# Altium PCB PCB.PcbDoc
Units mm, origin at the board's own origin, x right, y up, seen from the top; angles counter-clockwise.
Board outline 160.02 x 130.81 mm, 2 copper layers (Top Layer, Bottom Layer); 43 components, 24 nets, 102 pads, 2 vias.
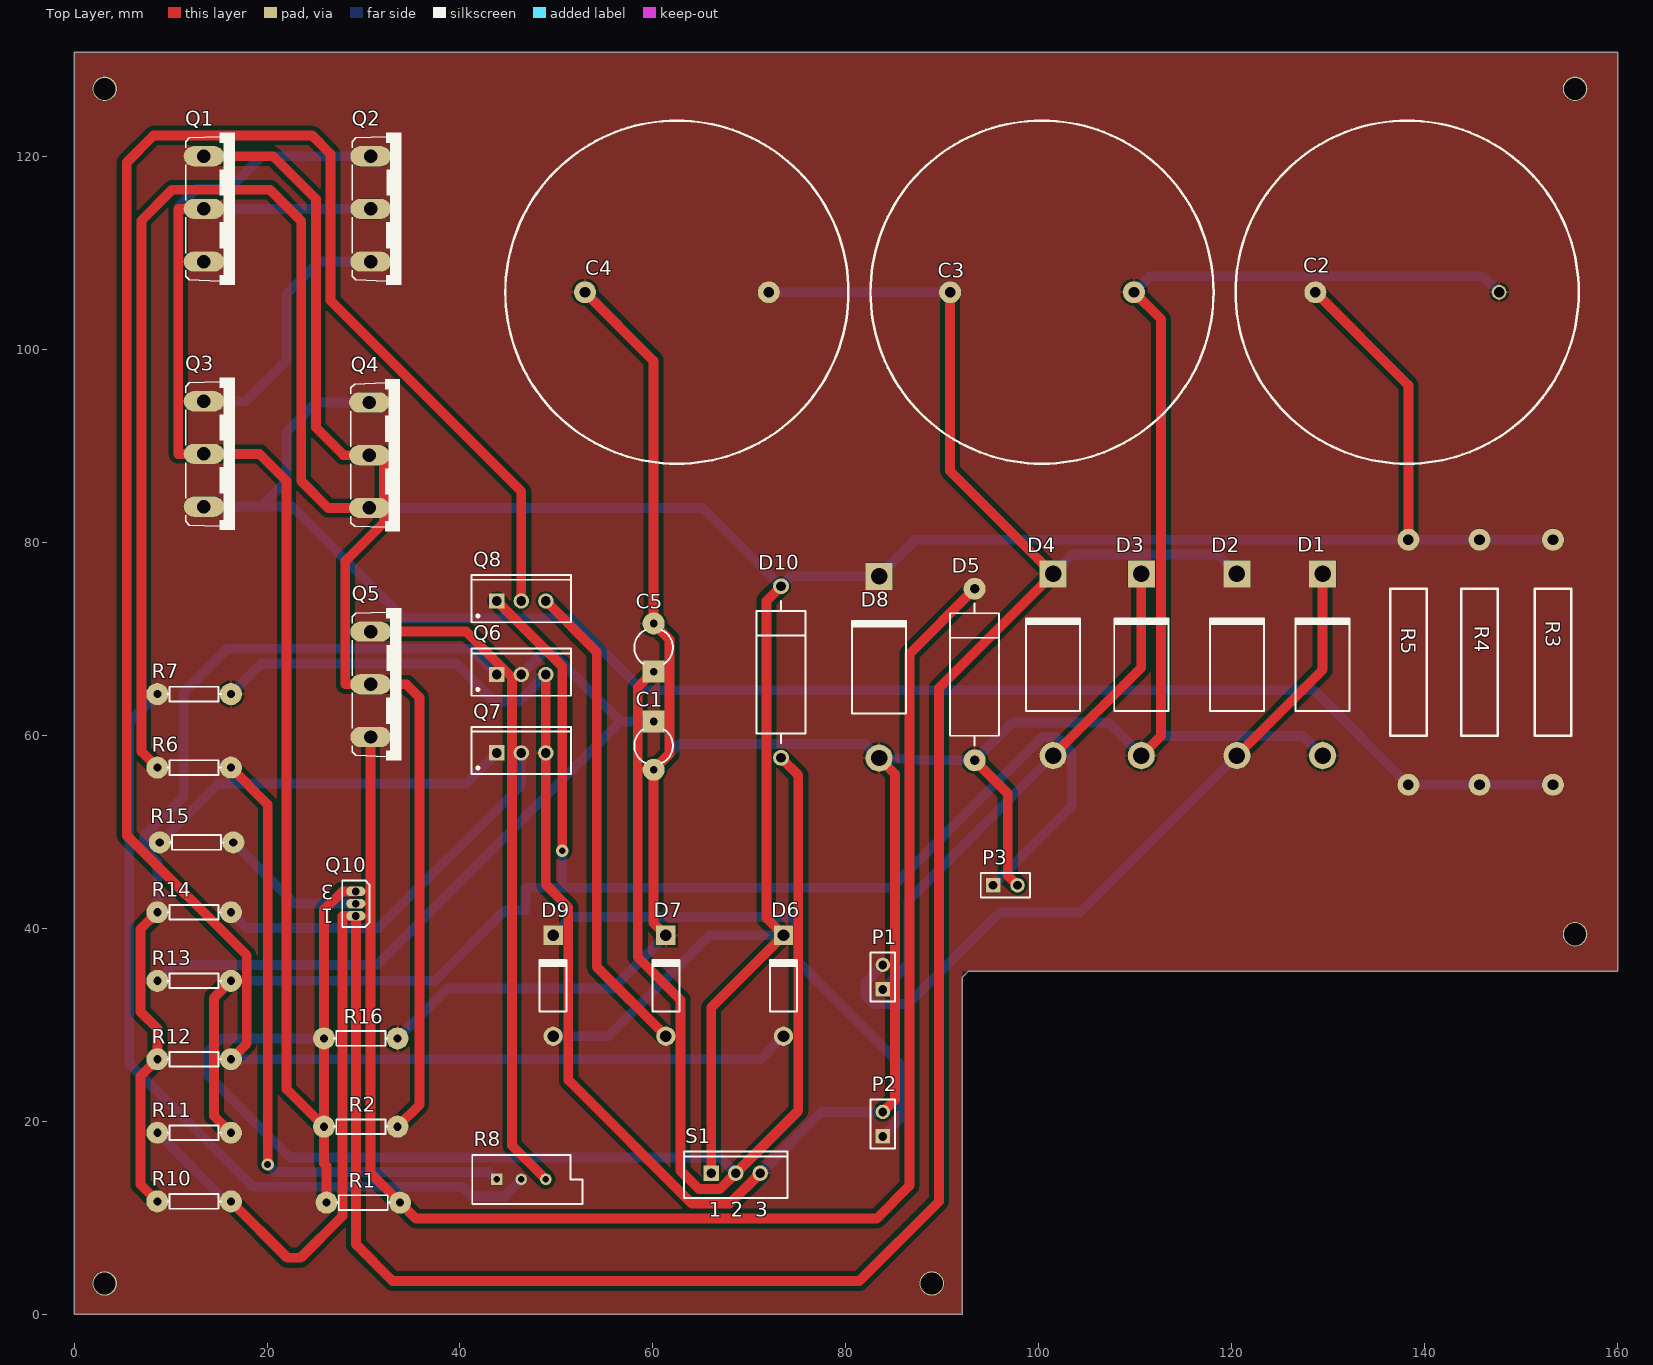
[diagram p0: Top Layer view]
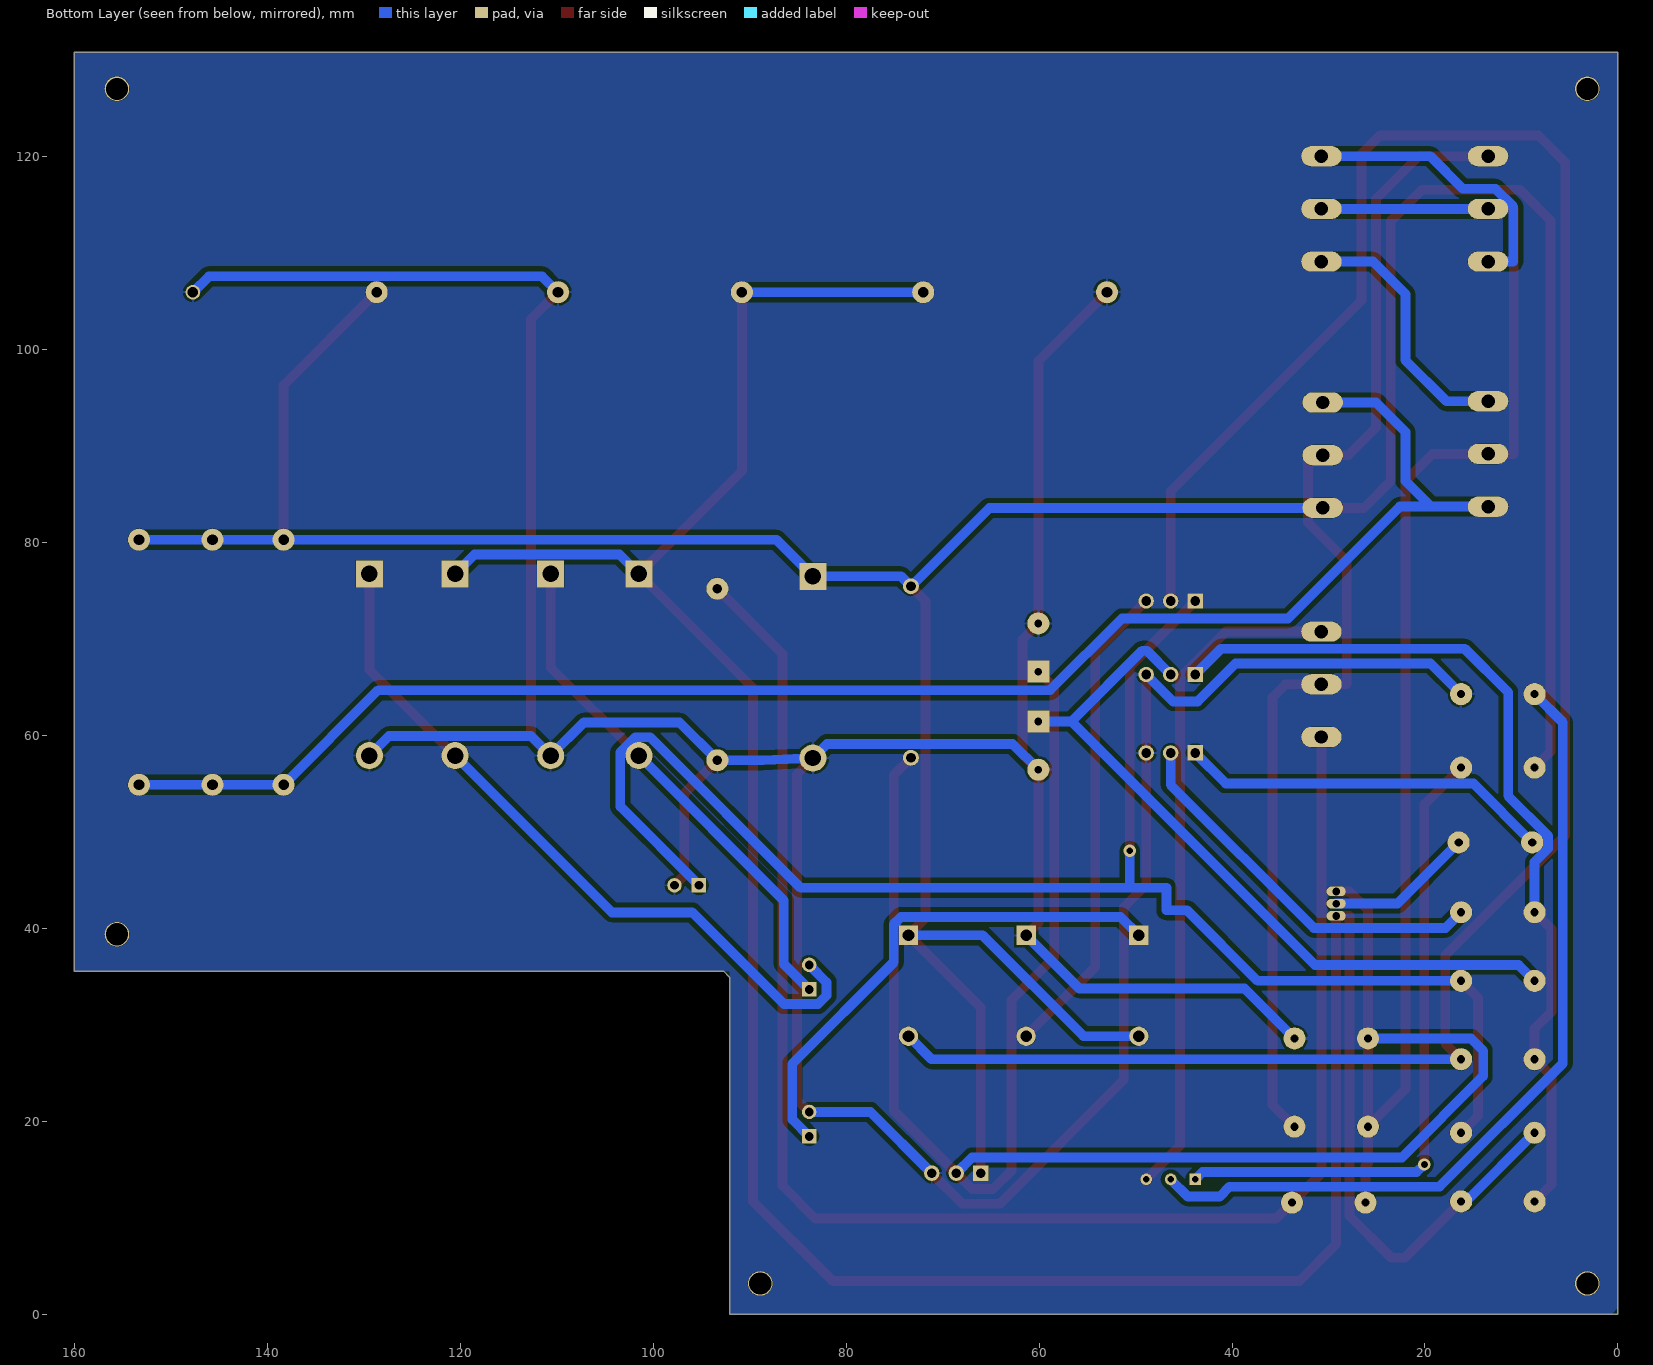
[diagram p1: Bottom Layer view, seen from below]

## Layer stack, top to bottom
Top Solder: solder mask 0.0102, Solder Resist, Dk 3.5
Top Layer: signal copper 0.0356
Dielectric 1: dielectric 0.32, FR-4, Dk 4.8
Bottom Layer: signal copper 0.0356
Bottom Solder: solder mask 0.0102, Solder Resist, Dk 3.5

## Board outline
0,0 92.075,0 92.075,34.925 92.71,35.56 160.02,35.56 160.02,130.81 0,130.81

## Design rules (kind name [scope] priority, off if disabled: settings)
Clearance [All] p1: gap=0 ignorepadtopadclearanceinfootprint=FALSE except(0.5: Arc-Arc Arc-Track Arc-Fill Arc-Poly Arc-Region Track-Track Track-Fill Track-Poly Track-Region)
PolygonConnect [All] p1: connectstyle=Relief reliefconductorwidth=0.254 reliefentries=4 polygonreliefangle="90 Angle" airgapwidth=0.254
RoutingVias [All] p1: holewidth=0.711 width=1.27 viastyle="Through Hole" minholewidth=0.711 minwidth=1.27 maxholewidth=0.711 maxwidth=1.27
SolderMaskExpansion [All] p1: expansion=0.102
Width [All] p1: maxlimit=1.397 minlimit=1.003 preferedwidth=1.016
30 further rules are at their usual default settings.

## Components (designator, comment, footprint, x,y, rotation, side; value= is the part's Value field where it differs from the comment)
C1 "Cap2" CAPR5-4X5 60.071,58.928 r270 top value=0.1uF
C2 "10mF" PCBComponent_1#1 128.651,105.918 r0 top
C3 "10mF" PCBComponent_1#2 90.805,105.918 r0 top
C4 "10mF" PCBComponent_1#2 72.009,105.918 r180 top
C5 "Cap2" CAPR5-4X5 60.071,69.088 r90 top value=0.047uF
D1 "Diode 1N5408" DO-201AD 129.413,67.31 r90 top
D2 "Diode 1N5408" DO-201AD 120.523,67.31 r90 top
D3 "Diode 1N5408" DO-201AD 110.617,67.31 r90 top
D4 "Diode 1N5408" DO-201AD 101.473,67.31 r90 top
D5 "6.2V" DIODE-0.7#1 93.345,66.294 r90 top
D6 "Diode 11DQ03" DO-204AL 73.533,34.036 r90 top
D7 "Diode 11DQ03" DO-204AL 61.341,34.036 r90 top
D8 "Diode 1N5408" DO-201AD 83.439,67.056 r90 top
D9 "Diode 11DQ03" DO-204AL 49.657,34.036 r90 top
D10 "10V" DIODE-0.7#2 73.279,66.548 r90 top
P1 "Header 2" HDR1X2 83.82,33.655 r90 top
P2 "Header 2" HDR1X2 83.82,18.415 r90 top
P3 "Header 2" HDR1X2 95.25,44.45 r0 top
Q1 "TIP3055" TOP3AV 16.637,114.554 r270 top
Q2 "TIP3055" TOP3AV 33.909,114.554 r270 top
Q3 "TIP3055" TOP3AV 16.637,89.154 r270 top
Q4 "TIP3055" TOP3AV 33.782,89.027 r270 top
Q5 "TIP3055" TOP3AV 33.909,65.278 r270 top
Q6 "NPN" TO-262-AA 46.355,66.294 r0 top
Q7 "NPN" TO-262-AA 46.355,58.166 r0 top
Q8 "NPN" TO-262-AA 46.355,73.914 r0 top
Q10 "PNP1" E3 29.21,42.545 r180 top
R1 "Res1" AXIAL-0.3 29.972,11.557 r180 top value=1K
R2 "Res1" AXIAL-0.3 29.718,19.431 r180 top value=1K
R3 "0.22" PCBComponent_1#3 153.289,54.864 r90 top
R4 "0.22" PCBComponent_1#3 145.669,54.864 r90 top
R5 "0.22" PCBComponent_1#3 138.303,54.864 r90 top
R6 "Res1" AXIAL-0.3 12.446,56.642 r180 top value=0.5K
R7 "Res1" AXIAL-0.3 12.446,64.262 r180 top value=2K
R8 "RPot" VR5 46.355,13.97 r0 top value=2K
R10 "Res1" AXIAL-0.3 12.446,11.684 r0 top value=4.7K
R11 "Res1" AXIAL-0.3 12.446,18.796 r180 top value=4.7K
R12 "Res1" AXIAL-0.3 12.446,26.416 r180 top value=22K
R13 "Res1" AXIAL-0.3 12.446,34.544 r180 top value=22K
R14 "Res1" AXIAL-0.3 12.446,41.656 r180 top value=100K
R15 "Res1" AXIAL-0.3 12.7,48.895 r0 top value=3.3K
R16 "Res1" AXIAL-0.3 29.718,28.575 r180 top value=1K
S1 "SCR" TO-220-AB 68.58,14.605 r0 top

## Footprints (in the part's own frame and the unit in brackets; to place one, negate y for a bottom-side part, rotate by r counter-clockwise, add the part's x,y. Pads: shape width x height; smd on the part's side, far side on the other; paste and mask are expansions set on the pad)
AXIAL-0.3 [mil] "Axial Device, Thru-Hole; 2 Leads; 0.3 in Pin Spacing"
  round 90 hole 33.46: 1(-150,0) 2(150,0)
  silkscreen extent -109,-30 109,30
CAPR5-4X5 [mil] "Capacitor; 2 Leads"
  rect 90x90 hole 31.5: 1(-98.43,0)
  round 90 hole 31.5: 2(98.43,0)
  silkscreen extent -66,-79 72,79
DIODE-0.7#1 [mil] "Diode, Thru-Hole; 2 Leads; 0.7 in Pin Spacing"
  round 90 hole 39.37: 1(-350,0) 2(350,0)
  silkscreen extent -290,-100 290,100
DIODE-0.7#2 [mil] "Diode, Thru-Hole; 2 Leads; 0.7 in Pin Spacing"
  round 64.96 hole 39.37: 1(-350,0) 2(350,0)
  silkscreen extent -290,-100 290,100
DO-201AD [mm] "Diode, Axial; Body 9.5 x 5.6 mm (LxDia. max), Lead Dia. 1.32 mm (max)"
  round 2.8 hole 1.7: 1(-9.42,0)
  rect 2.8x2.8 hole 1.7: 2(9.42,0)
  silkscreen extent -4.8,-2.8 4.9,2.8
DO-204AL [mm] "Diode, Axial; Body 5.2 x 2.7 mm (LxDia. max), Lead Dia. 0.86 mm (max)"
  round 2 hole 1.2: 1(-5.23,0)
  rect 2x2 hole 1.2: 2(5.23,0)
  silkscreen extent -2.65,-1.4 2.75,1.4
E3 [mm] "TO, Flat Index; 3 In-Line, Axial Leads; Body Dia. 4.6mm; Lead Dia. 0.5 mm (max)"
  oval 2x1 hole 0.8: 1(0,1.27) 2(0,0) 3(0,-1.27)
  silkscreen extent -1.41,-2.41 1.41,2.41
HDR1X2 [mm] "Connector; Header; 2 Position"
  rect 1.5x1.5 hole 0.9: 1(0,0)
  round 1.5 hole 0.9: 2(2.54,0)
  silkscreen extent -1.27,-1.27 3.81,1.27
PCBComponent_1#1 [mil]
  round 90 hole 43.31: 1(0,0)
  round 60 hole 43.31: 2(750,0)
  silkscreen extent -325,-700 1075,700
PCBComponent_1#2 [mil]
  round 90 hole 43.31: 1(0,0) 2(750,0)
  silkscreen extent -325,-700 1075,700
PCBComponent_1#3 [mil]
  round 90 hole 43.31: 1(0,0) 2(1000,0)
  silkscreen extent 200,-75 800,75
TO-220-AB [mm] "TO, Thru-Hole, Vertical, Heatsink Mounted; 3 In-Line Leads; Pitch 2.54 mm"
  rect 1.6x1.6 hole 1: 1(-2.54,0)
  round 1.6 hole 1: 2(0,0) 3(2.54,0)
  silkscreen extent -5.35,-2.55 5.35,2.25
TO-262-AA [mm] "TO, Thru-Hole, Vertical, Heatsink Mounted; 3 In-Line Leads; Pitch 2.54 mm"
  rect 1.6x1.6 hole 1: 1(-2.54,0)
  round 1.6 hole 1: 2(0,0) 3(2.54,0)
  silkscreen extent -5.15,-2.2 5.15,2.7, body extent -5.2,-2.25 5.2,2.75, height 19.7
TOP3AV [mil]
  oval 82.5x165 hole 55: B(-215,-125) C(0,-125) E(215,-125)
  silkscreen extent -310,-200 310,0
VR5 [mm] "Thru-Hole; 3 Leads"
  rect 1.2x1.2 hole 0.7: 1(-2.54,0)
  round 1.2 hole 0.7: 2(0,0) 3(2.54,0)
  silkscreen extent -5.08,-2.54 6.35,2.54

## Part data
C1 C5: "Capacitor", PackageDescription="Capacitor; 2 Leads", PackageReference=CAPR5-4X5, Published=23-Sep-2002, Publisher="Altium Limited"
C2 C3 C4: library part Component_1, "diameter 35mm"
D1 D2 D3 D4 D8: "3 Amp Medium Power Silicon Rectifier Diode", ComponentLink1Description="Manufacturer Link", ComponentLink1URL=http://www.irf.com/, DatasheetVersion=Aug-1984, LatestRevisionDate=17-Jul-2002, LatestRevisionNote="Re-released for DXP Platform.", PackageDescription="Diode, Axial; Body 9.5 x 5.3 mm (LxDia. max), Lead Dia. 1.32 mm (max)", PackageReference=DO-201AD, Published=8-Jun-2000, Publisher="Altium Limited"
D5 D10: library part "D Zener", "Zener Diode", LatestRevisionDate=17-Jul-2002, LatestRevisionNote="Re-released for DXP Platform.", PackageDescription="Diode, Thru-Hole; 2 Leads; 0.7 in Pin Spacing", PackageReference=DIODE-0.7, Published=8-Jun-2000, Publisher="Altium Limited"
D6 D7 D9: "Schottky Rectifier", Code_JEDEC=DO-204-AL, ComponentLink1Description="Manufacturer Link", ComponentLink1URL=http://www.irf.com/, ComponentLink2Description=Datasheet, ComponentLink2URL=http://www.irf.com/product-info/datasheets/data/11dq03.pdf, DatasheetVersion=Dec-1997, LatestRevisionDate=17-Jul-2002, LatestRevisionNote="Re-released for DXP Platform.", PackageDescription="Diode, Axial; Body 5.2 x 2.7 mm (LxDia. max), Lead Dia. 0.86 mm (max)", PackageReference=DO-204AL, Published=8-Jun-2000, Publisher="Altium Limited"
P1 P2 P3: "Header, 2-Pin", LatestRevisionDate=17-Jul-2002, LatestRevisionNote="Re-released for DXP Platform.", Publisher="Altium Limited"
Q1 Q2 Q3 Q4 Q5: "Tranzistor bipolar _BJT_ NPN 60V 15A 90W Gura de trecere TO-247-3", Package="TO-247-3 Bourns", Availability=Unavailable, MF="ON Semiconductor", MP=TIP3055, Price=None, SnapEDA_Link=https://www.snapeda.com/parts/TIP3055/ON%20Semiconductor/view-part/2756238/?ref=snap
Q6 Q7 Q8: "NPN Bipolar Transistor", Code_JEDEC=TO-226-AA, LatestRevisionDate=17-Jul-2002, LatestRevisionNote="Re-released for DXP Platform.", PackageDescription="TO, Flat Index; 3 In-Line, Axial Leads; Body Dia. 4.8mm; Leads 0.55 x 0.51 mm (max)", PackageReference=TO-226-AA, Published=8-Jun-2000, Publisher="Altium Limited"
Q10: "PNP Darlington Bipolar Transistor", ComponentLink1Description="Manufacturer Link", ComponentLink1URL=http://www.zetex.com/, DatasheetVersion=May-1994, LatestRevisionDate=17-Jul-2002, LatestRevisionNote="Re-released for DXP Platform.", PackageDescription="TO, Flat Index; 3 In-Line, Axial Leads; Body Dia. 4.6mm; Lead Dia. 0.5 mm (max)", PackageReference=E3, PackageVersion=1995/1996, Published=8-Jun-2000, Publisher="Altium Limited"
R1 R2 R6 R7 R10 R11 R12 R13 R14 R15 R16: "Resistor", LatestRevisionDate=17-Jul-2002, LatestRevisionNote="Re-released for DXP Platform.", PackageDescription="Axial Device, Thru-Hole; 2 Leads; 0.3 in Pin Spacing", PackageReference=AXIAL-0.3, Published=8-Jun-2000, Publisher="Altium Limited"
R3 R4 R5: library part Component_1, "25mm length"
R8: "Potentiometer", LatestRevisionDate=17-Jul-2002, LatestRevisionNote="Re-released for DXP Platform.", PackageDescription="Variable Resistor, Thru-Hole; 3 Leads", PackageReference=VR5, Published=8-Jun-2000, Publisher="Altium Limited", Set Position=0.5, Sim Note="Enter the Resistance value and the set point into parameter fields."
S1: "Silicon Controlled Rectifier", Code_JEDEC=TO-220-AB, LatestRevisionDate=17-Jul-2002, LatestRevisionNote="Re-released for DXP Platform.", PackageReference=TO-220-AB, Published=8-Jun-2000, Publisher="Altium Limited"

## Free pads (board coordinates)
  round 2.54 hole 2.286: 17(3.175,3.175) 17(3.175,127) 17(88.9,3.175) 17(155.575,39.37) 17(155.575,127)

## Via types
v1: diameter 1.27, hole 0.711, Top Layer to Bottom Layer, 2 vias

## Nets (pads, with @x,y where several pads share a name; then routed paths per layer and width w, separated by ;. In a path a pad name is that pad's centre, name@x,y a point inside that pad or via, vN(x,y) a via of type N, cw(c..) or ccw(c..) an arc to the next point about the centre after c; other vN are vias at no path point)
GND: C1.2 C2.2 C3.2 C4.2 C5.2 D1.1 D3.1 D5.1 D7.2 D8.1 P2.2 P3.2 Q6.3 Q7.3 R7.1 R16.1 S1.3 | length 443
  Top Layer w1.016: Q6.3 Q7.3 48.895,44.501 51.232,42.164 51.232,24.257 64.051,11.438 67.953,11.438 S1.3 ; C4.2 60.071,98.806 C5.2 61.722,69.937 61.722,58.079 C1.2 60.071,40.536 D7.2 ; D8.1 85.078,55.997 85.078,22.213 P2.2 ; D5.1 96.774,53.975 96.774,45.466 P3.2 ; C3.2 112.649,103.124 112.649,59.922 D3.1
  Bottom Layer w1.016: R7.1 19.426,67.432 39.629,67.432 43.561,63.5 46.101,63.5 Q6.3 ; R16.1 38.71,33.757 55.832,33.757 D7.2 ; C1.2 62.749,59.106 81.969,59.106 D8.1 88.624,57.404 D5.1 97.255,61.314 107.193,61.314 D3.1 112.646,59.919 127.384,59.919 D1.1 ; S1.3 77.47,20.955 P2.2 ; C3.2 111.506,107.569 146.05,107.569 C2.2
NetC1_1: C1.1 Q6.2 R13.2 | length 76.9
  Bottom Layer w1.016: R13.2 10.287,36.195 31.409,36.195 56.642,61.428 ; Q6.2 48.819,68.758 49.312,68.758 56.642,61.428 ; C1.1 56.642,61.428
NetC2_1: C2.1 D6.2 D8.2 D9.1 D10.2 Q4.E R3.2 R4.2 R5.2 R6.2 S1.1 | length 363
  Top Layer w1.016: R6.2 6.985,58.293 6.985,113.36 10.16,116.535 20.32,116.535 23.546,113.309 23.546,86.36 26.34,83.566 Q4.E ; S1.1 66.04,31.773 D6.2 71.763,41.036 71.763,73.922 D10.2 ; C2.1 138.303,96.266 R5.2
  Bottom Layer w1.016: Q4.E 65.151,83.566 D10.2 74.317,76.476 D8.2 87.227,80.264 R5.2 R4.2 R3.2 ; D9.1 55.4,28.806 65.86,39.266 D6.2
NetC5_1: C5.1 D10.1 R16.2 S1.2 | length 181.8
  Top Layer w1.016: C5.1 58.42,64.937 58.42,37.008 62.865,32.563 62.865,14.859 64.77,12.954 66.929,12.954 S1.2 75.057,21.082 75.057,55.88 D10.1
  Bottom Layer w1.016: R16.2 15.24,28.575 13.97,27.305 13.97,24.663 22.393,16.24 66.945,16.24 S1.2
NetD1_2: D1.2 D2.1 P1.2 | length 76
  Top Layer w1.016: D2.1 129.413,66.78 D1.2
  Bottom Layer w1.016: P1.2 82.017,34.392 82.017,33.02 82.906,32.131 86.436,32.131 95.936,41.631 104.264,41.631 D2.1
NetD3_2: D3.2 D4.1 P1.1 | length 54.2
  Top Layer w1.016: D4.1 110.617,67.034 D3.2
  Bottom Layer w1.016: P1.1 86.462,36.297 86.462,42.879 D4.1
NetD5_2: D5.2 Q5.E R1.1 | length 169.1
  Top Layer w1.016: Q5.E 30.734,14.605 R1.1 35.417,9.922 83.201,9.922 86.594,13.315 86.594,68.433 D5.2
NetD6_1: D6.1 Q8.2 R12.1 | length 234.7
  Top Layer w1.016: R12.1 17.907,28.067 17.907,37.16 5.461,49.606 5.461,119.38 8.23,122.149 24.685,122.149 26.578,120.256 26.578,105.045 46.355,85.268 Q8.2
  Bottom Layer w1.016: R12.1 71.143,26.416 D6.1
NetD7_1: D7.1 Q8.3 | length 50.3
  Top Layer w1.016: Q8.3 54.178,68.631 54.178,35.969 D7.1
NetD9_2: D9.2 P2.1 | length 53.6
  Bottom Layer w1.016: D9.2 51.564,41.173 74.295,41.173 75.057,40.411 75.057,36.474 85.573,25.959 85.573,20.168 P2.1
NetP3_1: P3.1 Q8.1 R11.1 R13.1 | length 166.5
  Top Layer w1.016: R11.1 14.503,20.549 14.503,32.791 R13.1 ; Q8.1 50.597,67.132 v1(50.597,48.031)
  Bottom Layer w1.016: R13.1 37.338,34.544 44.653,41.859 46.803,41.859 46.803,44.196 50.597,44.196 ; v1(50.597,48.031) 50.597,44.196 ; P3.1 103.403,52.603 103.403,58.242 101.848,59.798 100.308,59.798 84.706,44.196 50.597,44.196
NetQ1_B: Q1.B Q4.C Q5.C R2.1 | length 124.4
  Top Layer w1.016: Q1.B 20.617,120.015 25.062,115.57 25.062,91.905 27.94,89.027 Q4.C 32.123,89.027 32.123,82.05 28.118,78.045 28.118,65.278 Q5.C 34.442,65.278 35.789,63.932 35.789,21.692 R2.1
NetQ1_C: Q1.C Q2.C Q3.C Q10.3 R1.2 R2.2 | length 160.8
  Top Layer w1.016: Q1.C 10.795,114.554 10.795,89.154 Q3.C 19.228,89.154 22.022,86.36 22.022,23.317 R2.2 ; R1.2 26.162,15.367 25.908,15.621 R2.2 ; Q10.3 27.813,43.815 25.908,41.91 R2.2
  Bottom Layer w1.016: Q1.C Q2.C
NetQ1_E: Q1.E Q2.B | length 30.4
  Bottom Layer w1.016: Q1.E 10.846,109.093 10.846,114.783 12.7,116.637 16.078,116.637 19.456,120.015 Q2.B
NetQ2_E: Q2.E Q3.B | length 27.3
  Bottom Layer w1.016: Q3.B 17.78,94.615 22.022,98.857 22.022,105.715 25.4,109.093 Q2.E
NetQ3_E: Q3.E Q4.B R3.1 R4.1 R5.1 | length 170.5
  Bottom Layer w1.016: Q3.E 19.355,83.693 ; Q4.B 25.07,94.488 22.022,91.44 22.022,86.36 19.355,83.693 ; R3.1 R4.1 R5.1 128.499,64.668 58.852,64.668 51.41,72.111 34.188,72.111 22.606,83.693 19.355,83.693
NetQ5_B: Q5.B R8.3 | length 70.1
  Top Layer w1.016: Q5.B 40.64,70.739 45.39,65.989 45.39,17.475 R8.3
NetQ6_1: Q6.1 R10.1 R12.2 R14.2 | length 93.4
  Top Layer w1.016: R10.1 6.883,13.437 6.883,24.663 R12.2 8.636,29.591 6.883,31.344 6.883,39.903 R14.2
  Bottom Layer w1.016: R14.2 8.636,46.863 7.239,48.26 7.239,49.581 11.379,53.721 11.379,64.465 15.875,68.961 41.148,68.961 Q6.1
NetQ7_1: Q7.1 R15.1 | length 38.8
  Bottom Layer w1.016: R15.1 14.986,54.991 40.64,54.991 Q7.1
NetQ7_2: Q7.2 R14.1 | length 40.2
  Bottom Layer w1.016: R14.1 17.882,40.03 31.521,40.03 46.355,54.864 Q7.2
NetQ10_2: Q10.2 R15.2 | length 15.3
  Bottom Layer w1.016: R15.2 22.86,42.545 Q10.2
NetR6_1: R6.1 R8.1 | length 67.1
  Top Layer w1.016: R6.1 20.066,52.832 v1(20.066,15.519)
  Bottom Layer w1.016: v1(20.066,15.519) 20.861,14.724 43.061,14.724 R8.1
NetR7_2: R7.2 R8.2 | length 86.6
  Bottom Layer w1.016: R7.2 5.723,61.349 5.723,25.991 18.506,13.208 40.259,13.208 41.267,12.2 44.585,12.2 R8.2
VCC: C3.1 C4.1 D2.2 D4.2 Q10.1 R10.2 R11.2 | length 301.4
  Top Layer w1.016: R10.2 22.098,5.842 23.495,5.842 27.813,10.16 27.813,41.275 Q10.1 29.21,7.239 33.02,3.429 81.382,3.429 89.637,11.684 89.637,64.894 D4.2 90.805,87.398 C3.1
  Bottom Layer w1.016: R11.2 15.748,11.684 R10.2 ; C4.1 C3.1 ; D4.2 103.483,78.74 118.513,78.74 D2.2

## Polygon pours and split planes (outlines as drawn)
GND on Top Layer "Top Layer-No Net" (solid, pour order 16): 0,130.81 160.02,130.81 160.02,35.56 92.075,35.56 92.075,0 0,0
GND on Bottom Layer "Top Layer-No Net" (solid, pour order 20): 0,130.81 160.02,130.81 160.02,35.56 92.075,35.56 92.075,0 0.635,0 0,0.635

## Text inside footprints (layer, text, board x,y; h text height)
Q10: Top Overlay "1" at 26.935,41.99 h1.5 r180; Top Overlay "3" at 26.935,44.508 h1.5 r180
S1: Top Overlay "1" at 65.79,10.08 h1.5; Top Overlay "2" at 68.08,10.08 h1.5; Top Overlay "3" at 70.62,10.08 h1.5